# Altium PCB PCB.PcbDoc
Units mm, origin at the board's own origin, x right, y up, seen from the top; angles counter-clockwise.
Board outline 54 x 52 mm, 2 copper layers (Top Layer, Bottom Layer); 9 components, 27 nets, 98 pads, 0 vias.
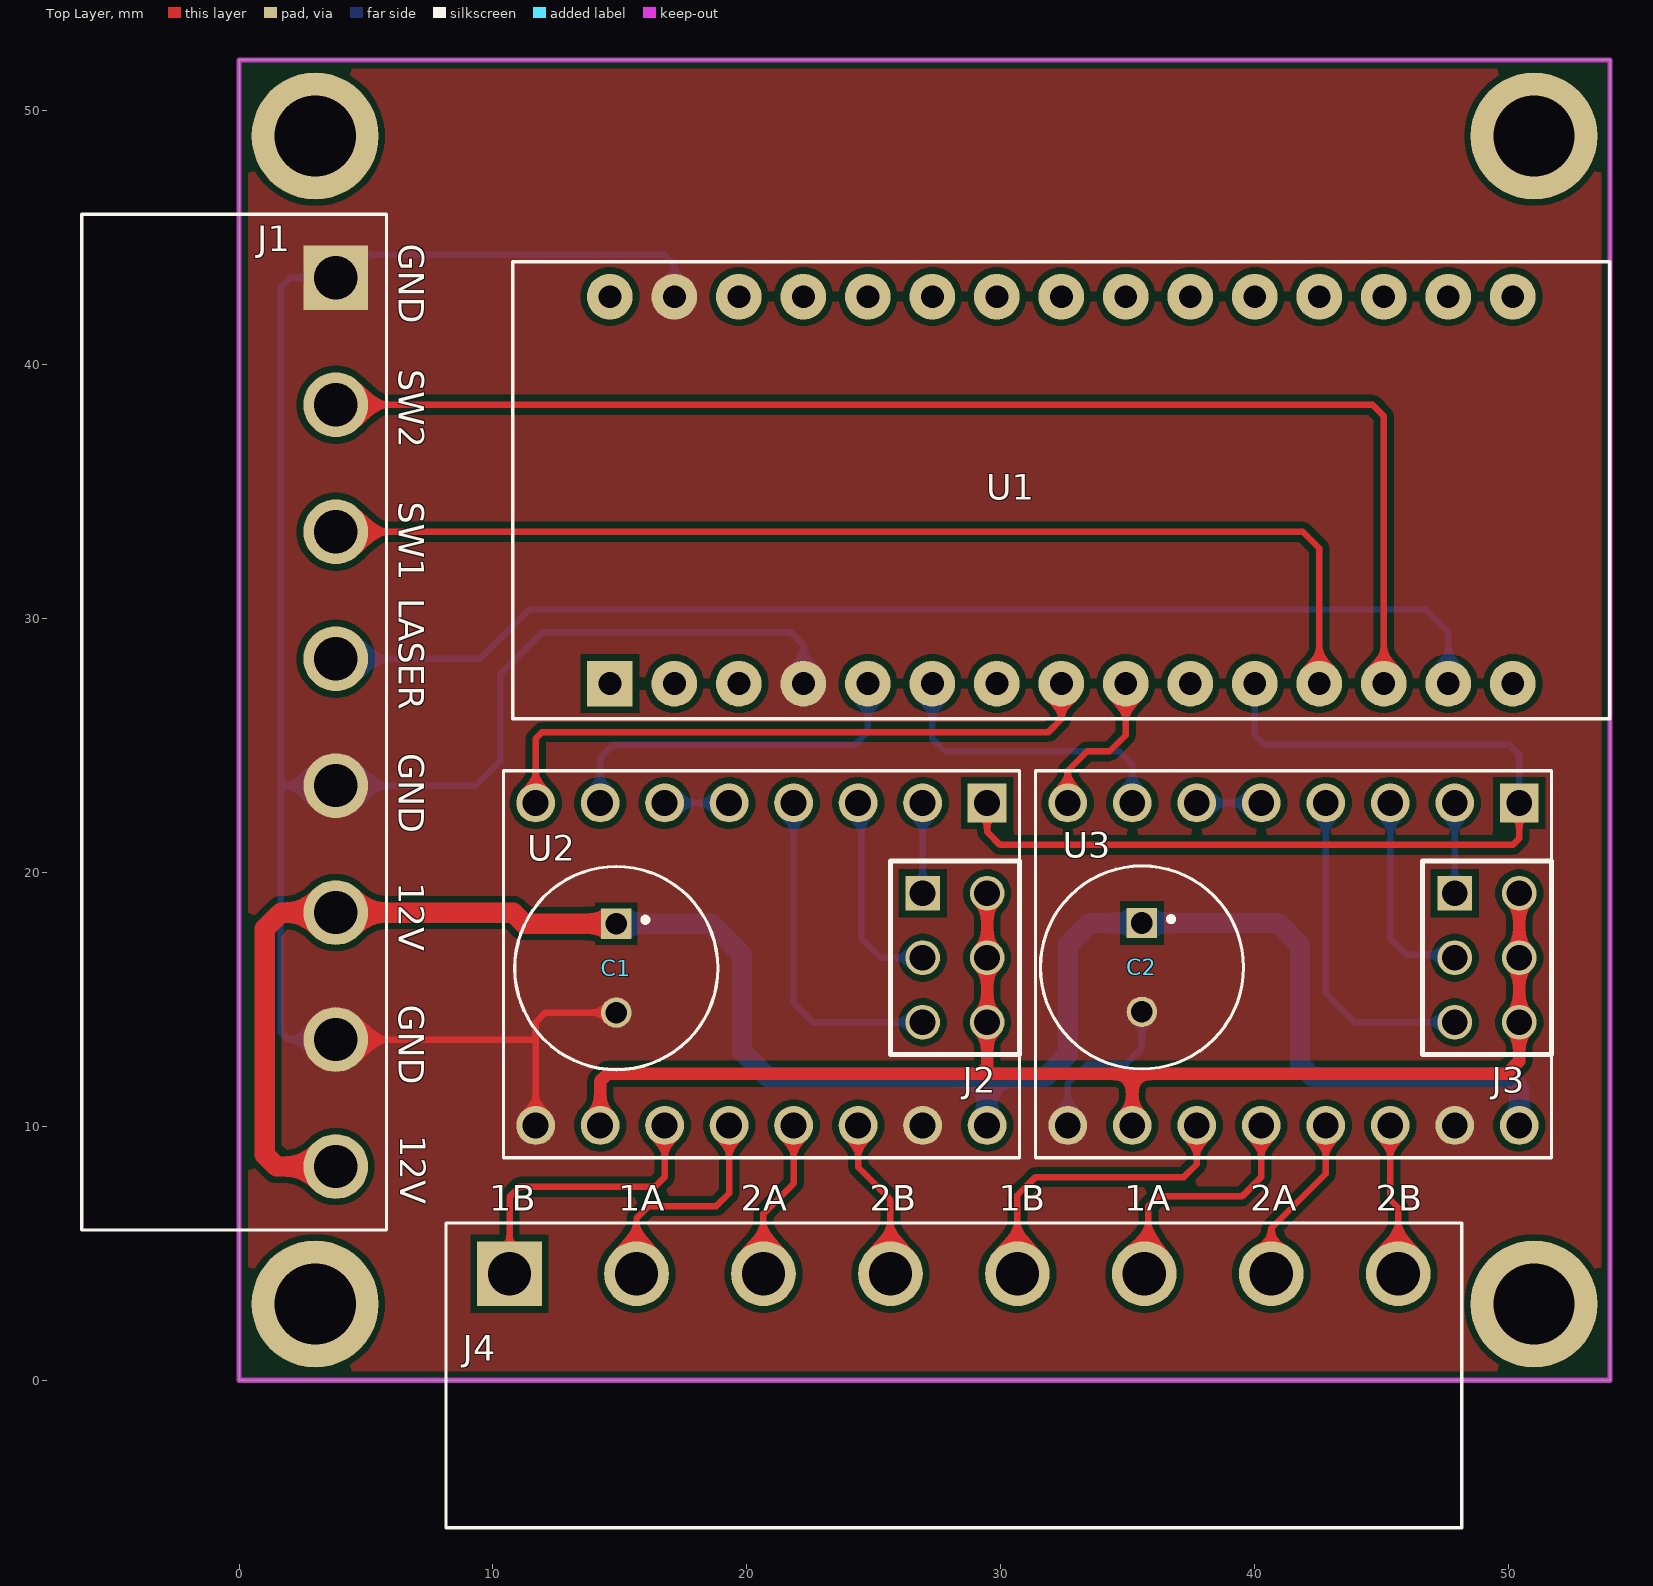
[diagram p0: Top Layer view]
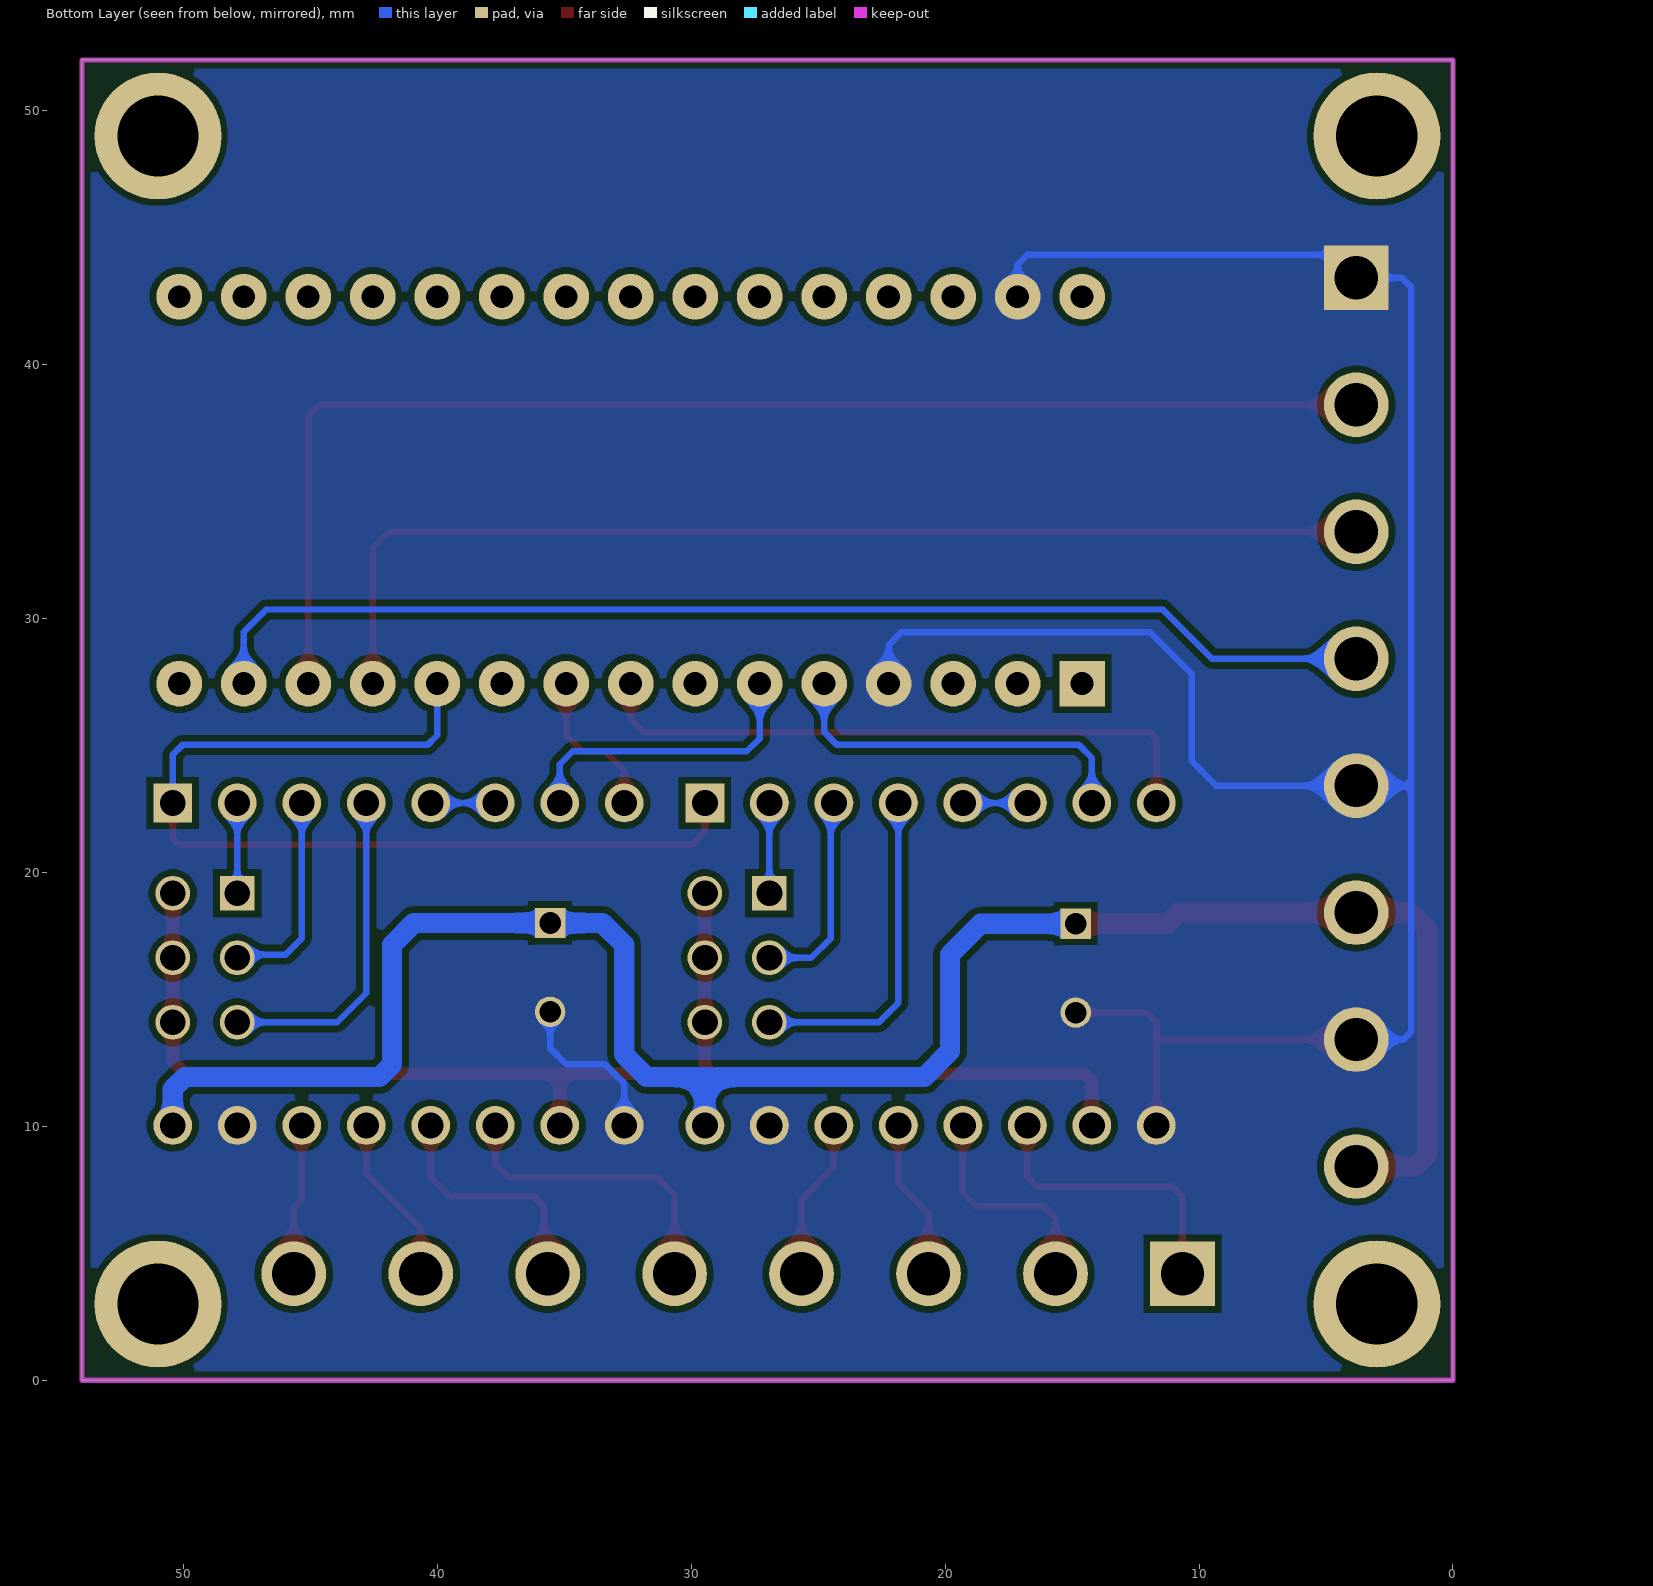
[diagram p1: Bottom Layer view, seen from below]
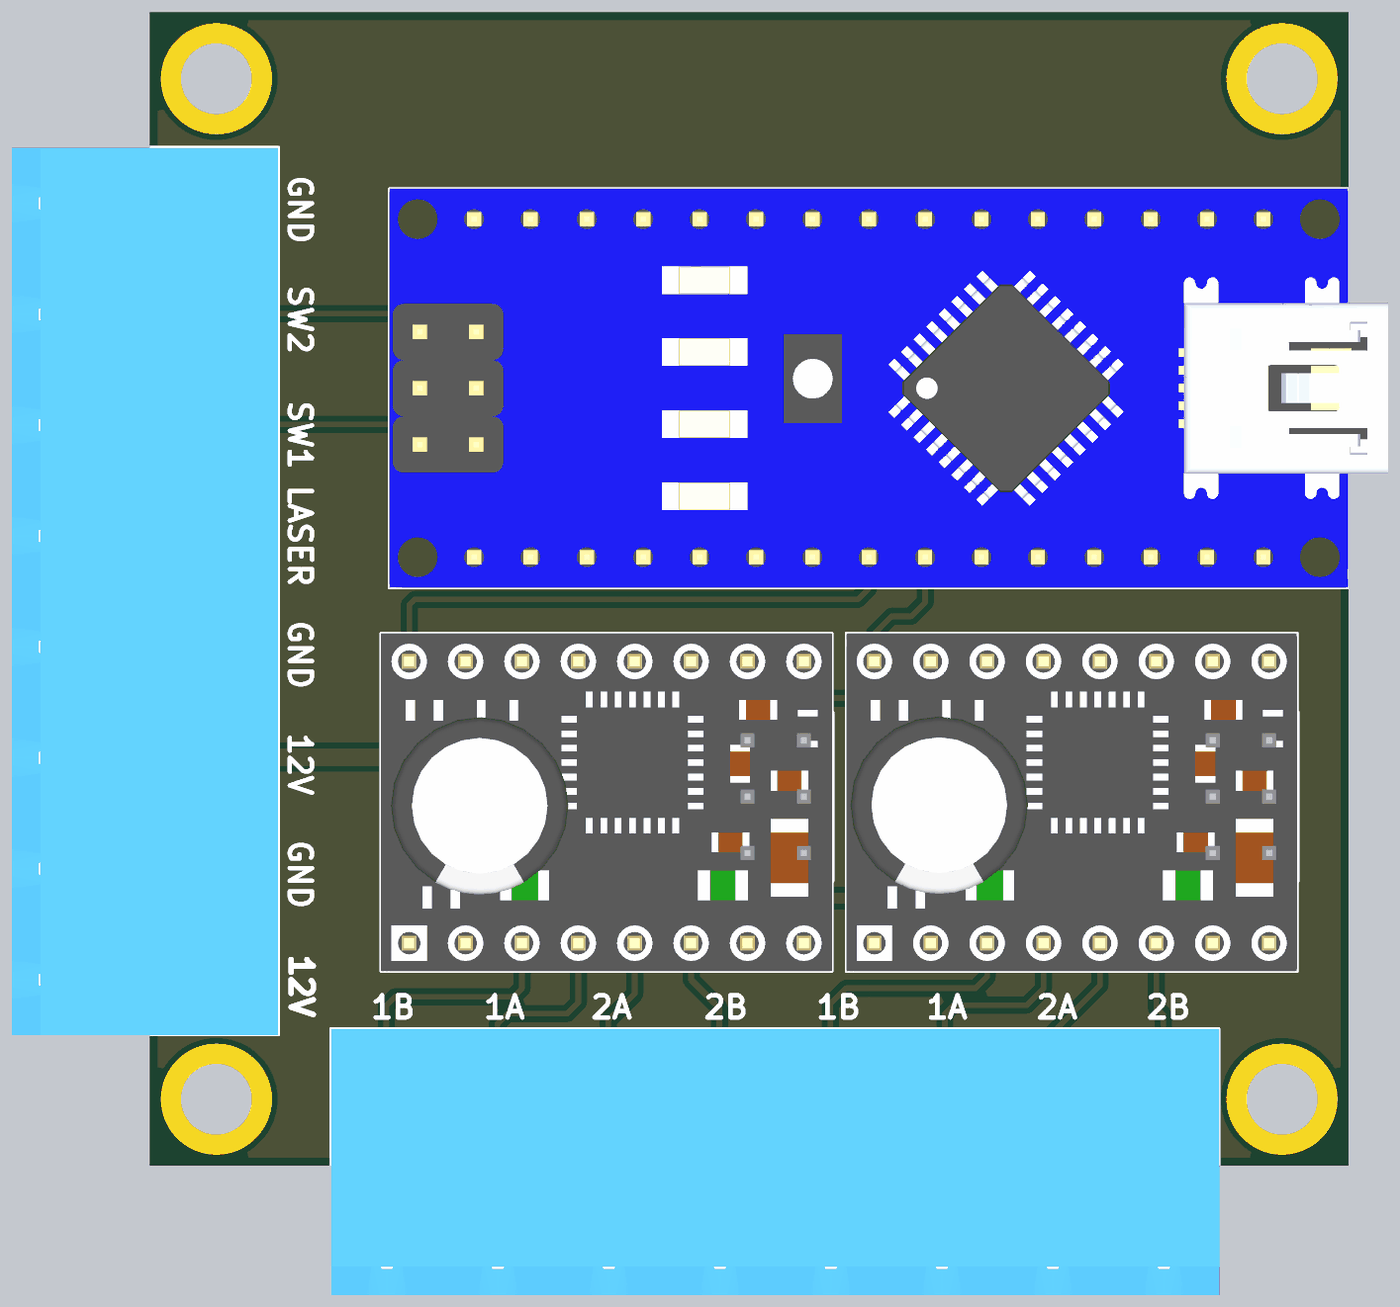
[diagram p2: 3D render of the assembled board from above, using the file's embedded part models]

## Layer stack, top to bottom
Top Solder: solder mask 0.0102, Solder Resist, Dk 3.5
Top Layer: signal copper 0.0356
Dielectric 1: dielectric 0.32, FR-4, Dk 4.8
Bottom Layer: signal copper 0.0356
Bottom Solder: solder mask 0.0102, Solder Resist, Dk 3.5

## Board outline
0,0 0,52 54,52 54,0

## Design rules (kind name [scope] priority, off if disabled: settings)
Clearance [All] p1: gap=0.254 ignorepadtopadclearanceinfootprint=FALSE
PlaneConnect [All] p1: planeconnectstyle=Direct reliefexpansion=0.508 reliefentries=4 reliefconductorwidth=0.254 reliefairgap=0.254
PolygonConnect [All] p1: connectstyle=Direct reliefconductorwidth=0.254 reliefentries=4 polygonreliefangle="90 Angle" airgapwidth=0.254
RoutingVias [All] p1: holewidth=0.3 width=0.6 viastyle="Through Hole" minholewidth=0.3 minwidth=0.6 maxholewidth=0.3 maxwidth=0.6
SolderMaskExpansion [All] p1: expansion=0 istentingtop=FALSE
SupplyNets "Schematic Supply Nets_2" [InNet('12V')] p1: voltage=0.000
SupplyNets "Schematic Supply Nets_1" [InNet('GND')] p2: voltage=0.000
SupplyNets "Schematic Supply Nets" [InNet('5V')] p3: voltage=0.000
Width 12V [InNet('12V')] p1: maxlimit=0.8 minlimit=0.8 preferedwidth=0.8
Width 5V [InNet('5V')] p2: maxlimit=0.5 minlimit=0.5 preferedwidth=0.5
Width [All] p3: maxlimit=0.254 minlimit=0.254 preferedwidth=0.254
29 further rules are at their usual default settings.

## Classes and differential pairs
component class MCU: J1 U1
component class DRIVER: C1 C2 J2 J3 J4 U2 U3

## Components (designator, comment, footprint, x,y, rotation, side; value= is the part's Value field where it differs from the comment)
C1 "EEUFR1V101B" EEU-FR1V101B 14.859,16.228 r270 top
C2 "EEUFR1V101B" EEU-FR1V101B 35.56,16.256 r270 top
J1 "TBP04R1-500-08BE" TBP04R1-500-08BE 3.81,43.415 r270 top
J2 "TSW-103-24-T-D" TSW-103-24-T-D 26.924,19.177 r270 top
J3 "TSW-103-24-T-D" TSW-103-24-T-D 47.879,19.177 r270 top
J4 "TBP04R1-500-08BE" TBP04R1-500-08BE 10.654,4.191 r0 top
U1 "MODULE ARDUINO NANO" "MODULE ARDUINO NANO" 32.385,35.052 r90 top
U2 "MODULE A4988" "MODULE A4988" 20.574,16.383 r270 top
U3 "MODULE A4988" "MODULE A4988" 41.529,16.383 r270 top

## Footprints (in the part's own frame and the unit in brackets; to place one, negate y for a bottom-side part, rotate by r counter-clockwise, add the part's x,y. Pads: shape width x height; smd on the part's side, far side on the other; paste and mask are expansions set on the pad)
EEU-FR1V101B [mm]
  round 1.2 hole 0.85: N(1.75,0)
  rect 1.2x1.2 hole 0.85: P(-1.75,0)
  silkscreen extent -4,-4 4,4, body extent -4,-4 4,4, height 11.5
"MODULE A4988" [mm]
  rect 1.53x1.53 hole 1.02: 1(-6.35,8.89)
  round 1.53 hole 1.02: 2(-6.35,6.35) 3(-6.35,3.81) 4(-6.35,1.27) 5(-6.35,-1.27) 6(-6.35,-3.81) 7(-6.35,-6.35) 8(-6.35,-8.89) 9(6.35,-8.89) 10(6.35,-6.35) 11(6.35,-3.81) 12(6.35,-1.27) 13(6.35,1.27) 14(6.35,3.81) 15(6.35,6.35) 16(6.35,8.89)
  silkscreen extent -7.62,-10.16 7.62,10.16, body extent -7.62,-10.16 7.62,10.16, height 5.91
"MODULE ARDUINO NANO" [mm]
  rect 1.8x1.8 / inner round 1.8 / far side rect 1.8x1.8 hole 0.9: 1(-7.62,17.78)
  round 1.8 hole 0.9: 2(-7.62,15.24) 3(-7.62,12.7) 4(-7.62,10.16) 5(-7.62,7.62) 6(-7.62,5.08) 7(-7.62,2.54) 8(-7.62,0) 9(-7.62,-2.54) 10(-7.62,-5.08) 11(-7.62,-7.62) 12(-7.62,-10.16) 13(-7.62,-12.7) 14(-7.62,-15.24) 15(-7.62,-17.78) 16(7.62,-17.78) 17(7.62,-15.24) 18(7.62,-12.7) 19(7.62,-10.16) 20(7.62,-7.62) 21(7.62,-5.08) 22(7.62,-2.54) 23(7.62,0) 24(7.62,2.54) 25(7.62,5.08) 26(7.62,7.62) 27(7.62,10.16) 28(7.62,12.7) 29(7.62,15.24) 30(7.62,17.78)
  silkscreen extent -9,-21.6 9,21.6, body extent -9,-23.4 9,21.6, height 12.6
TBP04R1-500-08BE [mm]
  rect 2.55x2.55 / inner round 2.55 / far side rect 2.55x2.55 hole 1.7: 1(0,0)
  round 2.55 hole 1.7: 2(5,0) 3(10,0) 4(15,0) 5(20,0) 6(25,0) 7(30,0) 8(35,0)
  silkscreen extent -2.5,-10 37.5,2, body extent -2.47,-10.03 37.53,1.97, height 8.51
TSW-103-24-T-D [mm]
  rect 1.37x1.37 hole 1.02: 01(0,0)
  round 1.37 hole 1.02: 02(0,2.54) 03(2.54,0) 04(2.54,2.54) 05(5.08,0) 06(5.08,2.54)
  silkscreen extent -1.27,-1.27 6.35,3.81, body extent -1.27,-1.27 6.35,3.81, height 9.28

## Part data
C1 C2: "AL LYTIC, RADIAL, 35VDC, 100UF", Package="RADIAL-2 Panasonic", Availability="In Stock", Check_prices=https://www.snapeda.com/parts/EEUFR1V101B/Panasonic/view-part/5790218/?ref=eda, MF=Panasonic, MP=EEUFR1V101B, Price=None, SnapEDA_Link=https://www.snapeda.com/parts/EEUFR1V101B/Panasonic/view-part/5790218/?ref=snap
J1 J4: "2~24 Poles, Pluggable, Receptacle, Horizontal, 5.0 Pitch, Terminal Block Connector", Package=None, Check_prices=https://www.snapeda.com/parts/TBP04R1-500-08BE/Same+Sky/view-part/?ref=eda, MF="Same Sky", MP=TBP04R1-500-08BE, SnapEDA_Link=https://www.snapeda.com/parts/TBP04R1-500-08BE/Same+Sky/view-part/?ref=snap
J2 J3: "TSW - 2.54mm Samtec Pin Header 12.15mm Overall Pin Length (24) - Fast Stock(mcv)", Package=None, Availability=Unavailable, MP=TSW-103-24-T-D, Price=None
U1: "Small, complete, and breadboard-friendly board based on the ATmega328 (Arduino Nano 3.x)", Package="Non-Standard Arduino", Check_prices=https://www.snapeda.com/parts/Arduino%20Nano/Arduino/view-part/?ref=eda, MF=Arduino, MP="Arduino Nano", SnapEDA_Link=https://www.snapeda.com/parts/Arduino%20Nano/Arduino/view-part/?ref=snap
U2 U3: "Stepper motor controler; IC: A4988; 1A; Uin mot: 8Ã·35V", Package=None, Availability=Unavailable, MP=A4988_STEPPER_MOTOR_DRIVER_CARRIER, Price=None

## Free pads (board coordinates)
  round 5 hole 3.2: 13(3,49) 14(51,49) 15(51,3) 16(3,3)

## Nets (pads, with @x,y where several pads share a name; then routed paths per layer and width w, separated by ;. In a path a pad name is that pad's centre, name@x,y a point inside that pad or via, vN(x,y) a via of type N, cw(c..) or ccw(c..) an arc to the next point about the centre after c; other vN are vias at no path point)
1.1A: J4.2 U2.12 | length 8.9
  Top Layer w0.254: J4.2 15.654,6.383 16.129,6.858 18.796,6.858 19.304,7.366 U2.12
1.1B: J4.1 U2.11 | length 11.5
  Top Layer w0.254: J4.1 10.654,7.225 11.049,7.62 16.383,7.62 16.764,8.001 U2.11
1.2A: J4.3 U2.13 | length 6.3
  Top Layer w0.254: J4.3 20.654,6.557 21.844,7.747 U2.13
1.2B: J4.4 U2.14 | length 6.4
  Top Layer w0.254: U2.14 24.384,8.382 25.654,7.112 J4.4
2.1A: J4.6 U3.12 | length 9.7
  Top Layer w0.254: J4.6 35.814,4.351 35.814,6.858 36.195,7.239 39.497,7.239 40.259,8.001 U3.12
2.1B: J4.5 U3.11 | length 12.2
  Top Layer w0.254: J4.5 30.654,7.286 31.369,8.001 37.211,8.001 37.719,8.509 U3.11
2.2A: J4.7 U3.13 | length 6.7
  Top Layer w0.254: J4.7 40.654,5.983 42.799,8.128 U3.13
2.2B: J4.8 U3.14 | length 6
  Top Layer w0.254: U3.14 45.339,7.112 45.654,6.797 J4.8
5V: J2.02 J2.04 J2.06 J3.02 J3.04 J3.06 U2.10 U3.10 | length 54.1
  Top Layer w0.5: U2.10 14.224,11.772 14.517,12.065 29.171,12.065 ; J2.02 J2.04 J2.06 29.464,12.358 29.171,12.065 ; U3.10 35.179,12.065 ; J3.02 J3.04 J3.06 50.419,12.573 49.911,12.065 35.179,12.065 ; 29.171,12.065 35.179,12.065
12V: C1.P C2.P J1.6 J1.8 U2.16 U3.16 | length 80.3
  Top Layer w0.8: J1.8 1.485,8.415 1.016,8.884 1.016,17.78 1.651,18.415 J1.6 10.795,18.415 11.232,17.978 C1.P
  Bottom Layer w0.8: C1.P 18.598,17.978 19.812,16.764 19.812,12.954 20.828,11.938 29.464,11.938 ; U2.16 29.464,11.938 ; U3.16 50.419,11.469 49.95,11.938 42.291,11.938 41.783,12.446 41.783,17.145 40.922,18.006 C2.P 33.5,18.006 32.639,17.145 32.639,12.827 31.75,11.938 29.464,11.938
DIR1: U1.8 U2.8 | length 25
  Top Layer w0.254: U2.8 11.684,25.273 11.938,25.527 31.877,25.527 32.385,26.035 U1.8
DIR2: U1.9 U3.8 | length 6.2
  Top Layer w0.254: U3.8 32.639,24.003 33.401,24.765 34.29,24.765 34.925,25.4 U1.9
EN: U1.11 U2.1 U3.1 | length 38.5
  Top Layer w0.254: U2.1 29.464,21.59 29.972,21.082 50.165,21.082 50.419,21.336 U3.1
  Bottom Layer w0.254: U1.11 40.005,25.4 40.386,25.019 50.038,25.019 50.419,24.638 U3.1
GND: C1.N C2.N J1.1 J1.5 J1.7 U1.4 U1.29 U2.9 U2.15 U3.9 U3.15 | length 97.8
  Top Layer w0.254: J1.7 11.637,13.415 11.684,13.462 ; U2.9 11.684,13.462 ; C1.N 12.065,14.478 11.684,14.097 11.684,13.462
  Bottom Layer w0.254: J1.7 1.952,13.415 1.651,13.716 1.651,23.415 ; U1.29 17.145,43.942 16.764,44.323 4.718,44.323 J1.1 2.013,43.415 1.651,43.053 1.651,23.415 ; U1.4 22.225,28.956 21.717,29.464 11.938,29.464 10.287,27.813 10.287,24.384 9.318,23.415 J1.5 1.651,23.415 ; U3.9 32.639,11.684 33.401,12.446 34.925,12.446 35.56,13.081 C2.N
LASER: J1.4 U1.14 | length 47
  Bottom Layer w0.254: J1.4 9.492,28.415 11.43,30.353 46.736,30.353 47.625,29.464 U1.14
MS1.1: J2.01 U2.2 | length 3.6
  Bottom Layer w0.254: J2.01 U2.2
MS1.2: J2.03 U2.3 | length 8.1
  Bottom Layer w0.254: U2.3 24.511,22.606 24.511,17.399 25.273,16.637 J2.03
MS1.3: J2.05 U2.4 | length 13.3
  Bottom Layer w0.254: U2.4 21.844,14.859 22.606,14.097 J2.05
MS2.1: J3.01 U3.2 | length 3.6
  Bottom Layer w0.254: J3.01 U3.2
MS2.2: J3.03 U3.3 | length 8.2
  Bottom Layer w0.254: U3.3 45.339,17.399 45.974,16.764 47.752,16.764 J3.03
MS2.3: J3.05 U3.4 | length 13
  Bottom Layer w0.254: U3.4 42.799,15.24 43.942,14.097 J3.05
NetU2_5: U2.5 U2.6 | length 2.5
  Bottom Layer w0.254: U2.6 U2.5
NetU3_5: U3.5 U3.6 | length 2.5
  Bottom Layer w0.254: U3.6 U3.5
STEP1: U1.5 U2.7 | length 14.6
  Bottom Layer w0.254: U2.7 14.224,24.511 14.732,25.019 24.257,25.019 24.765,25.527 U1.5
STEP2: U1.6 U3.7 | length 12
  Bottom Layer w0.254: U1.6 27.305,25.273 27.813,24.765 34.671,24.765 35.179,24.257 U3.7
SW1: J1.3 U1.12 | length 44.3
  Top Layer w0.254: J1.3 41.896,33.415 42.545,32.766 U1.12
SW2: J1.2 U1.13 | length 52
  Top Layer w0.254: J1.2 44.643,38.415 45.085,37.973 U1.13
pads on no net: U1.1 U1.2 U1.3 U1.7 U1.10 U1.15 U1.16 U1.17 U1.18 U1.19 U1.20 U1.21 U1.22 U1.23 U1.24 U1.25 U1.26 U1.27 U1.28 U1.30

## Polygon pours and split planes (outlines as drawn)
GND on Bottom Layer "GND_L02_P000" (solid, remove dead copper, pour order 0): 0,52.07 0,0 53.975,0 53.975,52.07
GND on Top Layer "GND_L01_P001" (solid, remove dead copper, pour order 1): 0,52.07 0,0 53.975,0 53.975,52.07

## Keep-outs
Keep-Out Layer:
  the board outline again, w0.2

## Silkscreen, mask and mechanical layers (free items; w line width, h text height)
Top Overlay:
  text "GND" at 6.296,44.758 h1 r270
  text "SW2" at 6.296,39.805 h1 r270
  text "SW1" at 6.296,34.598 h1 r270
  text "LASER" at 6.296,30.788 h1 r270
  text "GND" at 6.296,24.692 h1 r270
  text "12V" at 6.296,19.612 h1 r270
  text "GND" at 6.296,14.786 h1 r270
  text "12V" at 6.35,9.652 h1 r270
  text "1B" at 9.852,6.677 h1
  text "1A" at 14.932,6.677 h1
  text "2A" at 19.758,6.677 h1
  text "2B" at 24.838,6.677 h1
  text "1B" at 29.918,6.677 h1
  text "1A" at 34.871,6.677 h1
  text "2A" at 39.824,6.677 h1
  text "2B" at 44.777,6.677 h1